# Altium PCB djb_v2_flex.PcbDoc
Units mm, origin at the board's own origin, x right, y up, seen from the top; angles counter-clockwise.
Board outline 31.95 x 6.55 mm, 2 copper layers (Top Layer, Bottom Layer), stack 0.051 mm thick; 5 components, 6 nets, 19 pads, 0 vias.
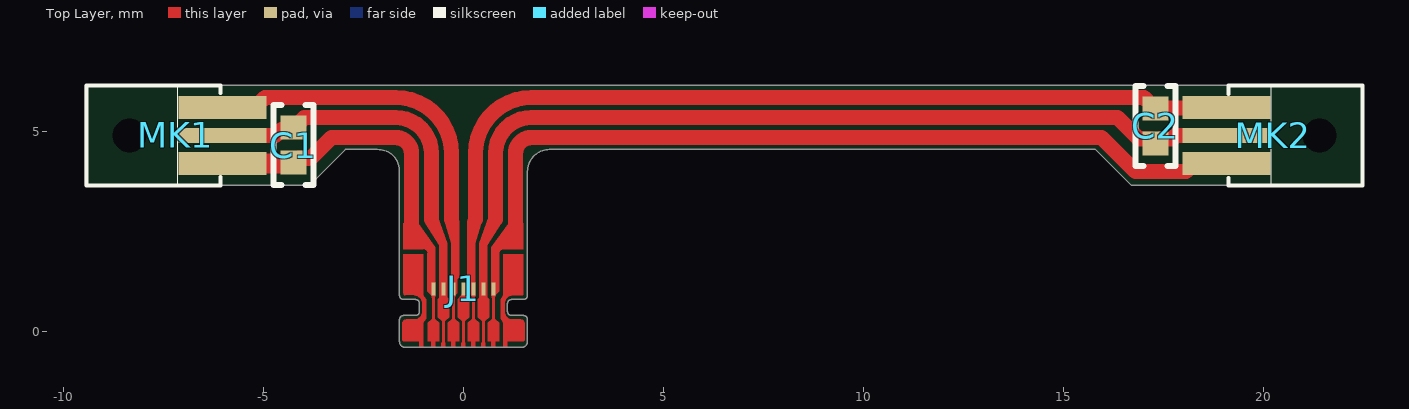
[diagram p0: Top Layer view]
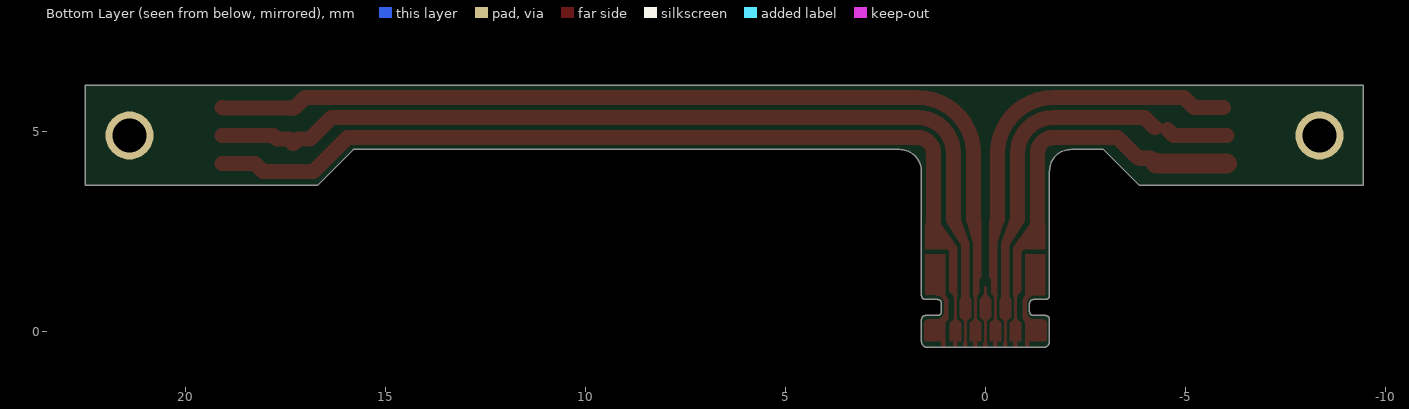
[diagram p1: Bottom Layer view, seen from below]
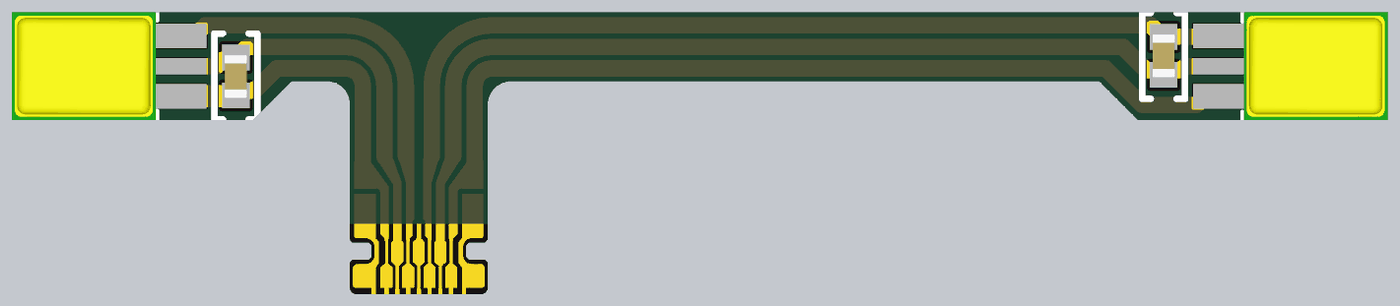
[diagram p2: 3D render of the assembled board from above, using the file's embedded part models]

## Layer stack, top to bottom
Top Solder: solder mask 0.012, Solder Resist, Dk 3.4
Top Layer: signal copper 0.0203
Dielectric 1: dielectric 0.0102, Polysomething, Dk 3.4
Bottom Layer: signal copper 0.0203
Bottom Solder: solder mask 0.012, Solder Resist, Dk 3.4

## Board outline
1.5,0.4 cw(c1.5,0.3) 1.6,0.3 1.6,-0.25 cw(c1.45,-0.25) 1.45,-0.4 -1.45,-0.4 cw(c-1.45,-0.25) -1.6,-0.25 -1.6,0.3 cw(c-1.5,0.3) -1.5,0.4 -1.2,0.4 ccw(c-1.2,0.5) -1.1,0.5 -1.1,0.7 ccw(c-1.2,0.7) -1.2,0.8 -1.5,0.8 cw(c-1.5,0.9) -1.6,0.9 -1.6,4 ccw(c-2.133,4.017) -2.15,4.55 -2.95,4.55 -3.85,3.65 -9.45,3.65 -9.45,6.15 22.5,6.15 22.5,3.65 16.7,3.65 15.8,4.55 2.15,4.55 ccw(c2.15,4) 1.6,4 1.6,0.9 cw(c1.5,0.9) 1.5,0.8 1.2,0.8 ccw(c1.2,0.7) 1.1,0.7 1.1,0.5 ccw(c1.2,0.5) 1.2,0.4
board region 1: 1.6,2.3 1.6,0.9 1.6,0.88 1.585,0.843 1.557,0.815 1.52,0.8 1.5,0.8 1.2,0.8 1.18,0.798 1.144,0.783 1.117,0.756 1.102,0.72 1.1,0.7 1.1,0.5 1.102,0.48 1.117,0.444 1.144,0.417 1.18,0.402 1.2,0.4 1.5,0.4 1.52,0.4 1.557,0.385 1.585,0.357 1.6,0.32 1.6,0.3 1.6,-0.25 1.6,-0.28 1.577,-0.335 1.535,-0.377 1.48,-0.4 1.45,-0.4 -1.45,-0.4 -1.48,-0.4 -1.535,-0.377 -1.577,-0.335 -1.6,-0.28 -1.6,-0.25 -1.6,0.3 -1.6,0.32 -1.585,0.357 -1.557,0.385 -1.52,0.4 -1.5,0.4 -1.2,0.4 -1.181,0.402 -1.145,0.417 -1.117,0.444 -1.102,0.48 -1.1,0.5 -1.1,0.7 -1.102,0.719 -1.117,0.756 -1.144,0.783 -1.181,0.798 -1.2,0.8 -1.5,0.8 -1.52,0.8 -1.557,0.815 -1.585,0.843 -1.6,0.88 -1.6,0.9 -1.6,2.307
board region 2: -1.6,2.307 -1.6,4 -1.608,4.108 -1.687,4.31 -1.84,4.463 -2.042,4.542 -2.15,4.55 -2.95,4.55 -3.85,3.65 -9.45,3.65 -9.45,6.15 22.5,6.15 22.5,3.65 16.7,3.65 15.8,4.55 2.15,4.55 2.043,4.539 1.844,4.457 1.693,4.306 1.611,4.107 1.6,4 1.6,2.3

## Design rules (kind name [scope] priority, off if disabled: settings)
BoardOutlineClearance BoardOutlineClearance_Silk [OnLayer('Top Overlay') Or OnLayer('Bottom Overlay')] p1: gap=0 ignorepadtopadclearanceinfootprint=FALSE
BoardOutlineClearance BoardOutlineClearance_FFC [InComponent('J1')] p2: gap=0 ignorepadtopadclearanceinfootprint=FALSE
BoardOutlineClearance BoardOutlineClearance_Normal [All] p3: gap=0.099 ignorepadtopadclearanceinfootprint=FALSE except(0: Arc-SplitBarrior Arc-SplitContinuation Track-SplitBarrior Track-SplitContinuation SMDPad-SplitBarrior SMDPad-SplitContinuation THPad-SplitBarrior THPad-SplitContinuation Via-SplitBarrior Via-SplitContinuation Fill-SplitBarrior Fill-SplitContinuation Poly-SplitBarrior Poly-SplitContinuation Region-SplitBarrior Region-SplitContinuation Text-SplitBarrior Text-SplitContinuation)
Clearance Clearance_SameNet [All] p1: gap=0.07 ignorepadtopadclearanceinfootprint=FALSE except(-1000: Arc-Via Track-Via SMDPad-Via THPad-Via Via-Via)
Clearance [All] p2: gap=0.07 ignorepadtopadclearanceinfootprint=FALSE
ComponentClearance [All] p1: gap=0 collisioncheckmode=3 verticalgap=0 showdistances=FALSE
MinimumSolderMaskSliver [All] p1: minsoldermaskwidth=0.076
PolygonConnect [All] p1: connectstyle=Relief reliefconductorwidth=0.254 reliefentries=4 polygonreliefangle="90 Angle" airgapwidth=0.254
RoutingVias [All] p1: holewidth=0.152 width=0.305 viastyle="Through Hole" minholewidth=0.152 minwidth=0.305 maxholewidth=2.032 maxwidth=2.54
SilkToSilkClearance [All] p1: silktosilkclearance=-25.4
SilkToSolderMaskClearance [IsPad] p1: minsilkscreentomaskgap=-25.4 clearancetoexposedcopper=TRUE
SolderMaskExpansion [All] p1: expansion=0.076
ViasUnderSMD [All] p1: allowed=FALSE
Width [All] p1: maxlimit=2.54 minlimit=0.07 preferedwidth=0.152 minimp=50.000000 maximp=50.000000 favimp=50.000000
26 further rules are at their usual default settings.

## Components (designator, comment, footprint, x,y, rotation, side; value= is the part's Value field where it differs from the comment)
C1 "10uF" "CAP 0402/1005" -4.25,4.66 r90 top
C2 "10uF" "CAP 0402/1005" 17.3,5.14 r270 top
J1 "FFC EDGE BOTTOM" HIROSE_FH58M-7S-0.25SHW-99_BOTTOMFFC 0,-0.4 r180 top locked
MK1 "MEMS" MIC_CAGRI -8.35,4.9 r90 top
MK2 "MEMS" MIC_CAGRI 21.4,4.9 r270 top

## Footprints (in the part's own frame and the unit in brackets; to place one, negate y for a bottom-side part, rotate by r counter-clockwise, add the part's x,y. Pads: shape width x height; smd on the part's side, far side on the other; paste and mask are expansions set on the pad)
"CAP 0402/1005" [mm] "Chip Capacitor, 2-Leads, Body 1.02x0.51mm, IPC Medium Density"
  rect 0.6x0.64 smd: 1(-0.44,0) 2(0.44,0)
  silkscreen extent -1,-0.5 1,0.5, body extent -0.5,-0.26 0.5,0.26, height 0.52
HIROSE_FH58M-7S-0.25SHW-99_BOTTOMFFC [mm] "Hirose FH58M-7S-0.25SHW(99) FFC Pattern for Bottom Contacts"
  rect 0.1x0.33 smd paste-1000 mask-1000: 1(-0.75,-1.465) 2(-0.5,-1.465) 3(-0.25,-1.465) 4(0,-1.465) 5(0.25,-1.465) 6(0.5,-1.465) 7(0.75,-1.465)
  Top Layer region: -1,0 -1.1,0 -1.1,-0.15 -1.48,-0.15 -1.499,-0.154 -1.515,-0.165 -1.526,-0.181 -1.53,-0.2 -1.53,-0.2 -1.53,-0.6 -1.522,-0.638 -1.501,-0.671 -1.468,-0.692 -1.43,-0.7 -1.43,-0.7 -1.23,-0.7 -1.153,-0.715 -1.089,-0.759 -1.045,-0.823 -1.03,-0.9 -1.03,-0.9 -1.03,-1.1 -1.045,-1.177 -1.089,-1.241 -1.153,-1.285 -1.23,-1.3 -1.23,-1.3 -1.45,-1.3 -1.469,-1.304 -1.485,-1.315 -1.496,-1.331 -1.5,-1.35 -1.5,-1.35 -1.5,-2.33 -1,-2.33 -1,-1.3 -0.93,-1.21 -0.93,-0.72 -1,-0.62
  Top Layer region: 1,0 1.1,0 1.1,-0.15 1.48,-0.15 1.499,-0.154 1.515,-0.165 1.526,-0.181 1.53,-0.2 1.53,-0.2 1.53,-0.6 1.522,-0.638 1.501,-0.671 1.468,-0.692 1.43,-0.7 1.43,-0.7 1.23,-0.7 1.153,-0.715 1.089,-0.759 1.045,-0.823 1.03,-0.9 1.03,-0.9 1.03,-1.1 1.045,-1.177 1.089,-1.241 1.153,-1.285 1.23,-1.3 1.23,-1.3 1.45,-1.3 1.469,-1.304 1.485,-1.315 1.496,-1.331 1.5,-1.35 1.5,-1.35 1.5,-2.33 1,-2.33 1,-1.3 0.93,-1.21 0.93,-0.72 1,-0.62
  Top Layer region: 0.47,-0.65 0.36,-0.75 0.36,-1.2 0.45,-1.3 0.45,-1.32 0.55,-1.32 0.55,-1.3 0.64,-1.2 0.64,-0.75 0.53,-0.65
  Top Layer region: -0.03,-0.65 -0.14,-0.75 -0.14,-1.2 -0.05,-1.3 -0.05,-1.32 0.05,-1.32 0.05,-1.3 0.14,-1.2 0.14,-0.75 0.03,-0.65
  Top Layer region: 0.61,-0.15 0.61,-0.62 0.72,-0.72 0.78,-0.72 0.89,-0.62 0.89,-0.15 0.8,-0.15 0.8,0 0.7,0 0.7,-0.15
  Top Layer region: 0.11,-0.15 0.11,-0.62 0.22,-0.72 0.28,-0.72 0.39,-0.62 0.39,-0.15 0.3,-0.15 0.3,0 0.2,0 0.2,-0.15
  Top Layer region: -0.39,-0.15 -0.39,-0.62 -0.28,-0.72 -0.22,-0.72 -0.11,-0.62 -0.11,-0.15 -0.2,-0.15 -0.2,0 -0.3,0 -0.3,-0.15
  Top Layer region: -0.89,-0.15 -0.89,-0.62 -0.78,-0.72 -0.72,-0.72 -0.61,-0.62 -0.61,-0.15 -0.7,-0.15 -0.7,0 -0.8,0 -0.8,-0.15
  Top Layer region: -0.53,-0.65 -0.64,-0.75 -0.64,-1.2 -0.55,-1.3 -0.55,-1.32 -0.45,-1.32 -0.45,-1.3 -0.36,-1.2 -0.36,-0.75 -0.47,-0.65
  Top Layer region: -0.3,-1.31 -0.3,-1.3 -0.28,-1.2 -0.22,-1.2 -0.2,-1.3 -0.2,-1.31
  Top Layer region: 0.2,-1.31 0.2,-1.3 0.22,-1.2 0.28,-1.2 0.3,-1.3 0.3,-1.31
  Top Layer region: 0.7,-1.31 0.7,-1.3 0.72,-1.2 0.78,-1.2 0.8,-1.3 0.8,-1.31
  Top Layer region: -0.8,-1.31 -0.8,-1.3 -0.78,-1.2 -0.72,-1.2 -0.7,-1.3 -0.7,-1.31
  Top Layer region: -0.55,0 -0.55,-0.1 -0.53,-0.16 -0.47,-0.16 -0.45,-0.1 -0.45,0
  Top Layer region: -0.05,0 -0.05,-0.1 -0.03,-0.16 0.03,-0.16 0.05,-0.1 0.05,0
  Top Layer region: 0.45,0 0.45,-0.1 0.47,-0.16 0.53,-0.16 0.55,-0.1 0.55,0
  Top Layer lines w0.07: 0.75,-0.1 0.75,-1.465 0.75,-1.5 ; 0.5,-0.1 0.5,-1.465 0.5,-1.5 ; 0.25,-0.1 0.25,-1.465 0.25,-1.5 ; 0,-0.1 0,-1.5 ; -0.25,-0.1 -0.25,-1.465 -0.25,-1.5 ; -0.5,-0.1 -0.5,-1.465 -0.5,-1.5 ; -0.75,-0.1 -0.75,-1.465 -0.75,-1.5
  body extent -1.6,-2.63 1.6,0, height 0.2
MIC_CAGRI [mm] "MQM-32325-000, O8XC03"
  rect 0.57x2.2 smd mask+0.025: 1(0.7,-2.32) 3(-0.7,-2.32)
  rect 0.381x2.2 smd mask+0.025: 2(0,-2.32)
  round 0 / inner round 1.2 / far side round 1.2 hole 0.85 unplated paste-0.7: RING(0,0)
  silkscreen extent -1.27,-2.27 1.25,1.08, body extent -1.25,-2.24 1.25,1.11, height 0.98

## Part data
C1 C2: library part C1005X5R0J106M050BC, "CAP CER 10UF 6.3V X5R 0402", Device Package="0402 (1005 Metric)", Manufacturer="TDK Corporation", Supplier Part Number 1=445-8920-2-ND, TemperatureCoefficient=X5R, TemperatureRange="-55C ~ 85C", Tolerance=20%, Voltage=6.3V, ComponentLink1Description=Datasheet, ComponentLink1URL=https://product.tdk.com/info/en/catalog/datasheets/mlcc_commercial_general_en.pdf, ComponentLink2Description="Digi-Key Listing", ComponentLink2URL=https://www.digikey.com/product-detail/en/tdk-corporation/C1005X5R0J106M050BC/445-8920-2-ND/3507809, PartId=12380, Part Number=C1005X5R0J106M050BC, Price=0.119, Supplier 1=Digi-Key
J1: library part HIROSE_FH58M-7S-0.25SHW-99_BOTTOM, "Bottom FFC Land Pattern for Hirose FH58M-7S-0.25SHW(99) 7-pin Top+Bottom Contact FFC Connector"
MK1 MK2: library part Mems_Mic_Cagri, "Generic 3-pin bottom mount MEMS mic, with Cagri extended footprint"

## Nets (pads, with @x,y where several pads share a name; then routed paths per layer and width w, separated by ;. In a path a pad name is that pad's centre, name@x,y a point inside that pad or via, vN(x,y) a via of type N, cw(c..) or ccw(c..) an arc to the next point about the centre after c; other vN are vias at no path point)
+MEMS1: C1.1 J1.7 MK1.3 | length 7.2
  Top Layer w0.381: C1.1@-4.25,4.2 C1.1@-4.244,4.206 ; C1.1 ccw(c-4.23,4.22) C1.1@-4.244,4.206 ; C1.1@-4.23,4.2 cw(c-4.23,4.22) C1.1@-4.244,4.206 ; -1.3,2.5 -1.3,4.45 ccw(c-1.7,4.45) -1.7,4.85 -3.3,4.85 -3.8,4.35 -3.85,4.35 -3.871,4.329 -4.121,4.329 C1.1@-4.244,4.206
  Top Layer w0.508: MK1.3 -4.27,4.2 C1.1
+MEMS2: C2.1 J1.3 MK2.3 | length 21.5
  Top Layer w0.381: 0.3,2.8 0.3,4.45 cw(c1.7,4.45) 1.7,5.85 17.01,5.85 17.26,5.6 C2.1@17.28,5.6 ; C2.1@17.31,5.6 C2.1@17.28,5.6 ; C2.1@17.35,5.6 C2.1@17.28,5.6 ; MK2.3 19.07,5.59 17.31,5.59 C2.1 ccw(c17.28,5.58) C2.1@17.28,5.6
GND1: C1.2 J1.6 MK1.2 | length 7.3
  Top Layer w0.381: MK1.2 -4.7,4.9 C1.2@-4.55,5.05 ; C1.2 -4.23,5.1 -3.98,5.35 -1.7,5.35 cw(c-1.7,4.45) -0.8,4.45 -0.8,2.8
GND2: C2.2 J1.2 MK2.2 | length 20.8
  Top Layer w0.381: 0.8,2.8 0.8,4.45 cw(c1.7,4.45) 1.7,5.35 16.35,5.35 16.89,4.81 17.191,4.81 C2.2 ; C2.2@17.32,4.7 C2.2 ; MK2.2 17.8,4.9 17.709,4.81 17.41,4.81 C2.2
MIC1: J1.5 MK1.1 | length 8.2
  Top Layer w0.381: MK1.1@-5.95,5.6 -5.215,5.6 -4.965,5.85 -1.7,5.85 cw(c-1.7,4.45) -0.3,4.45 -0.3,2.8
MIC2: J1.1 MK2.1 | length 20.4
  Top Layer w0.381: 1.3,2.5 1.3,4.45 cw(c1.7,4.45) 1.7,4.85 15.95,4.85 16.8,4 18.065,4 18.265,4.2 MK2.1
pads on no net: J1.4 MK1.RING MK2.RING

## Other copper
Top Layer:
  region net MIC2: 0.9,1 0.9,1.95 cw(c0.983,1.967) 1,2.05 1.5,2.05 1.5,2.7 1.136,2.7 0.7,2.1 0.7,0.9 0.8,0.9
  region net +MEMS1: -0.9,1 -0.9,1.95 ccw(c-0.983,1.967) -1,2.05 -1.5,2.05 -1.5,2.7 -1.136,2.7 -0.7,2.1 -0.7,1.2 -0.7,0.9 -0.8,0.9
  region net GND2: 0.6,0.45 0.6,2.15 0.95,2.7 0.95,2.9 0.65,2.9 0.4,2.2 0.4,0.45
  region net +MEMS2: 0.3,0.9 0.3,1.2 0.3,2.2 0.45,2.7 0.45,2.902 0.15,2.902 0.1,2.75 0.1,1.35 0.15,1.3 0.15,0.95 0.2,0.9
  region net MIC1: -0.3,0.9 -0.3,2.2 -0.45,2.7 -0.45,2.902 -0.15,2.902 -0.1,2.75 -0.1,1.35 -0.15,1.3 -0.15,0.95 -0.2,0.9
  region net GND1: -0.6,0.45 -0.6,2.15 -0.95,2.7 -0.95,2.9 -0.65,2.9 -0.4,2.2 -0.4,0.45
  region net +MEMS1: -0.75,1.065

## Silkscreen, mask and mechanical layers (free items; w line width, h text height)
Mechanical 3:
  lines w0.076: -9.45,3.65 -9.45,6.15 22.5,6.15 22.5,3.65 16.7,3.65 15.8,4.55 2.15,4.55 ccw(c2.15,4) 1.6,4 1.6,2.23 1.6,0.9 cw(c1.5,0.9) 1.5,0.8 1.2,0.8 ccw(c1.2,0.7) 1.1,0.7 1.1,0.5 ccw(c1.2,0.5) 1.2,0.4 1.5,0.4 cw(c1.5,0.3) 1.6,0.3 1.6,-0.25 cw(c1.45,-0.25) 1.45,-0.4 -1.45,-0.4 cw(c-1.45,-0.25) -1.6,-0.25 -1.6,0.3 cw(c-1.5,0.3) -1.5,0.4 -1.2,0.4 ccw(c-1.2,0.5) -1.1,0.5 -1.1,0.7 ccw(c-1.2,0.7) -1.2,0.8 -1.5,0.8 cw(c-1.5,0.9) -1.6,0.9 -1.6,2.25 -1.6,4 ccw(c-2.15,4) -2.15,4.55 -2.95,4.55 -3.85,3.65 -9.45,3.65
Mechanical 5 (Mech5):
  lines w0.076: -1.6,-0.25 ccw(c-1.45,-0.25) -1.45,-0.4 1.45,-0.4 ccw(c1.45,-0.25) 1.6,-0.25 1.6,0.3 ccw(c1.5,0.3) 1.5,0.4 1.2,0.4 cw(c1.2,0.5) 1.1,0.5 1.1,0.7 cw(c1.2,0.7) 1.2,0.8 1.5,0.8 ccw(c1.5,0.9) 1.6,0.9 1.6,2.23 -1.6,2.23 -1.6,0.9 ccw(c-1.5,0.9) -1.5,0.8 -1.2,0.8 cw(c-1.2,0.7) -1.1,0.7 -1.1,0.5 cw(c-1.2,0.5) -1.2,0.4 -1.5,0.4 ccw(c-1.5,0.3) -1.6,0.3 -1.6,-0.25